# Altium PCB MAGI'sBoostPowerV3.PcbDoc
Units mil, origin at the board's own origin, x right, y up, seen from the top; angles counter-clockwise.
Board outline 6000 x 4000 mil, 2 copper layers (Top Layer, Bottom Layer); 21 components, 11 nets, 80 pads, 75 vias.
Unrouted connection lines stored in the file: 1.
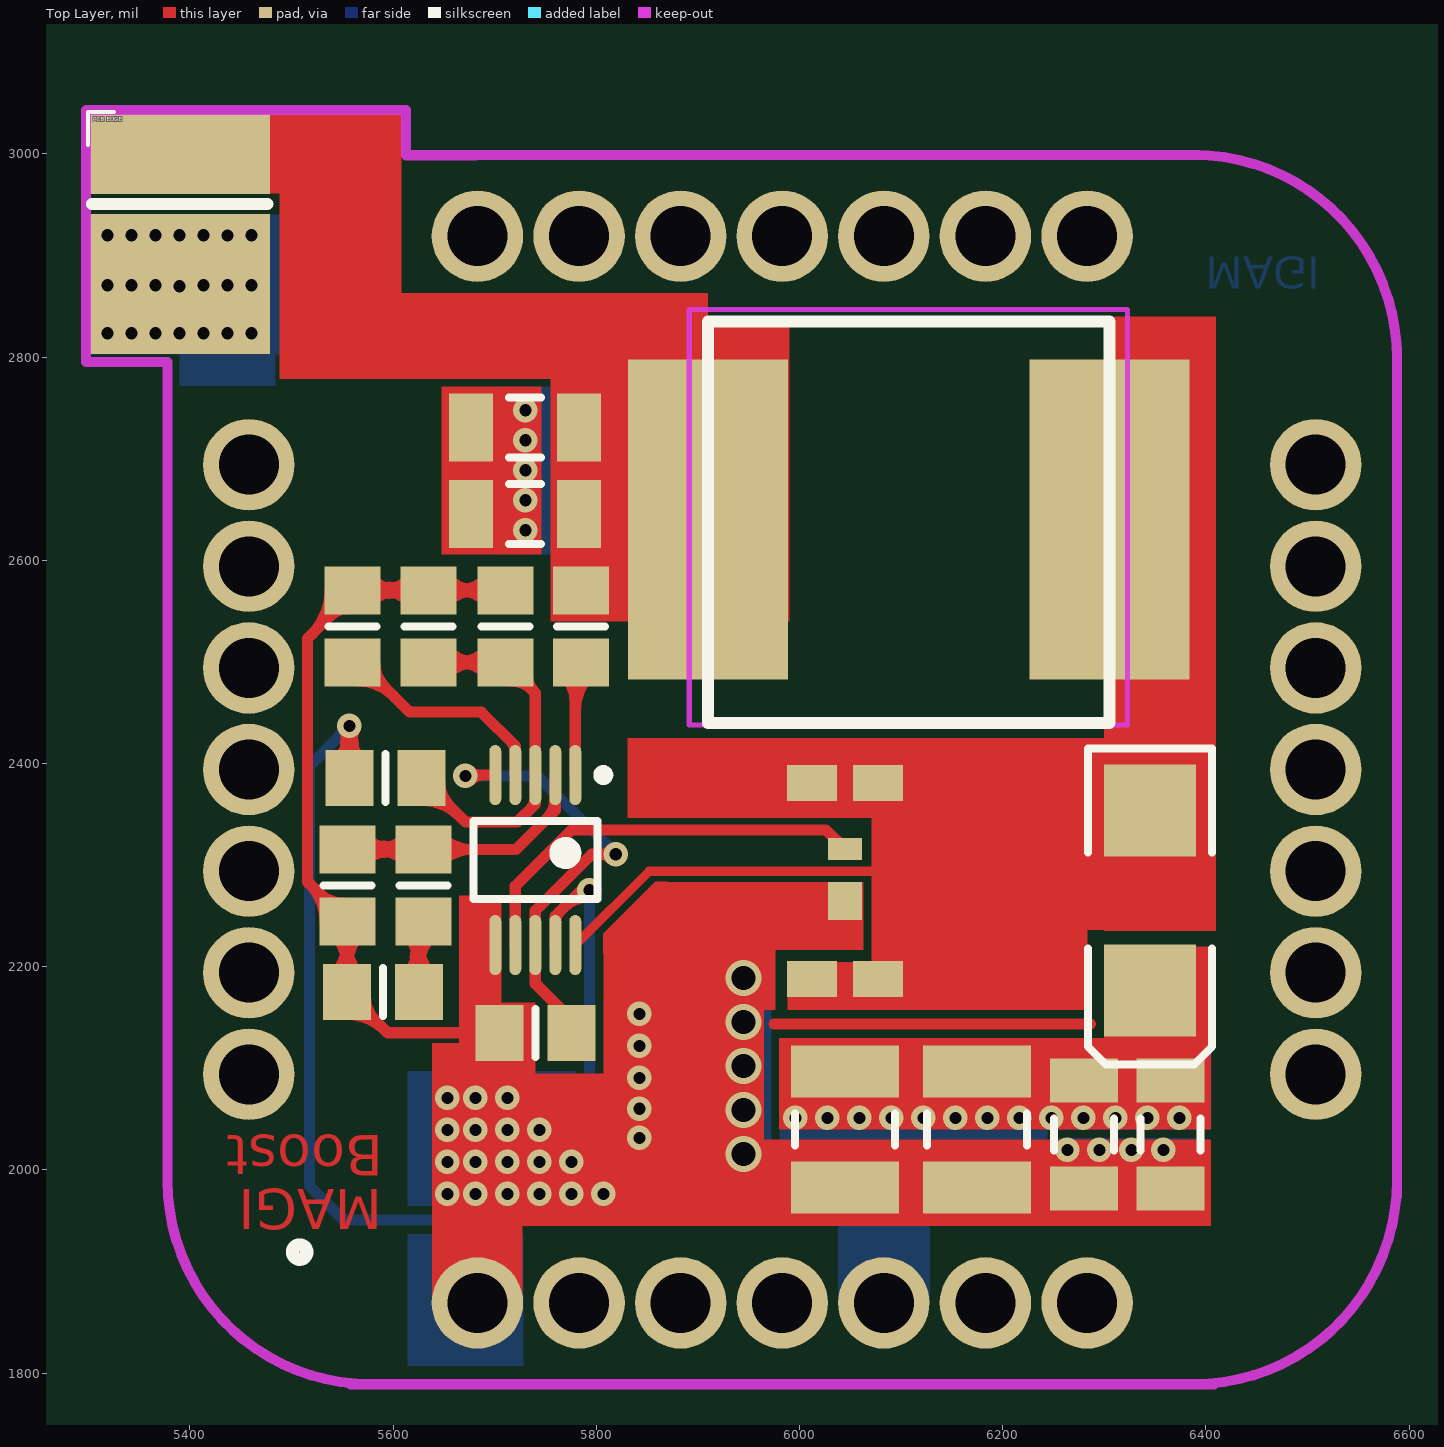
[diagram p0: Top Layer view]
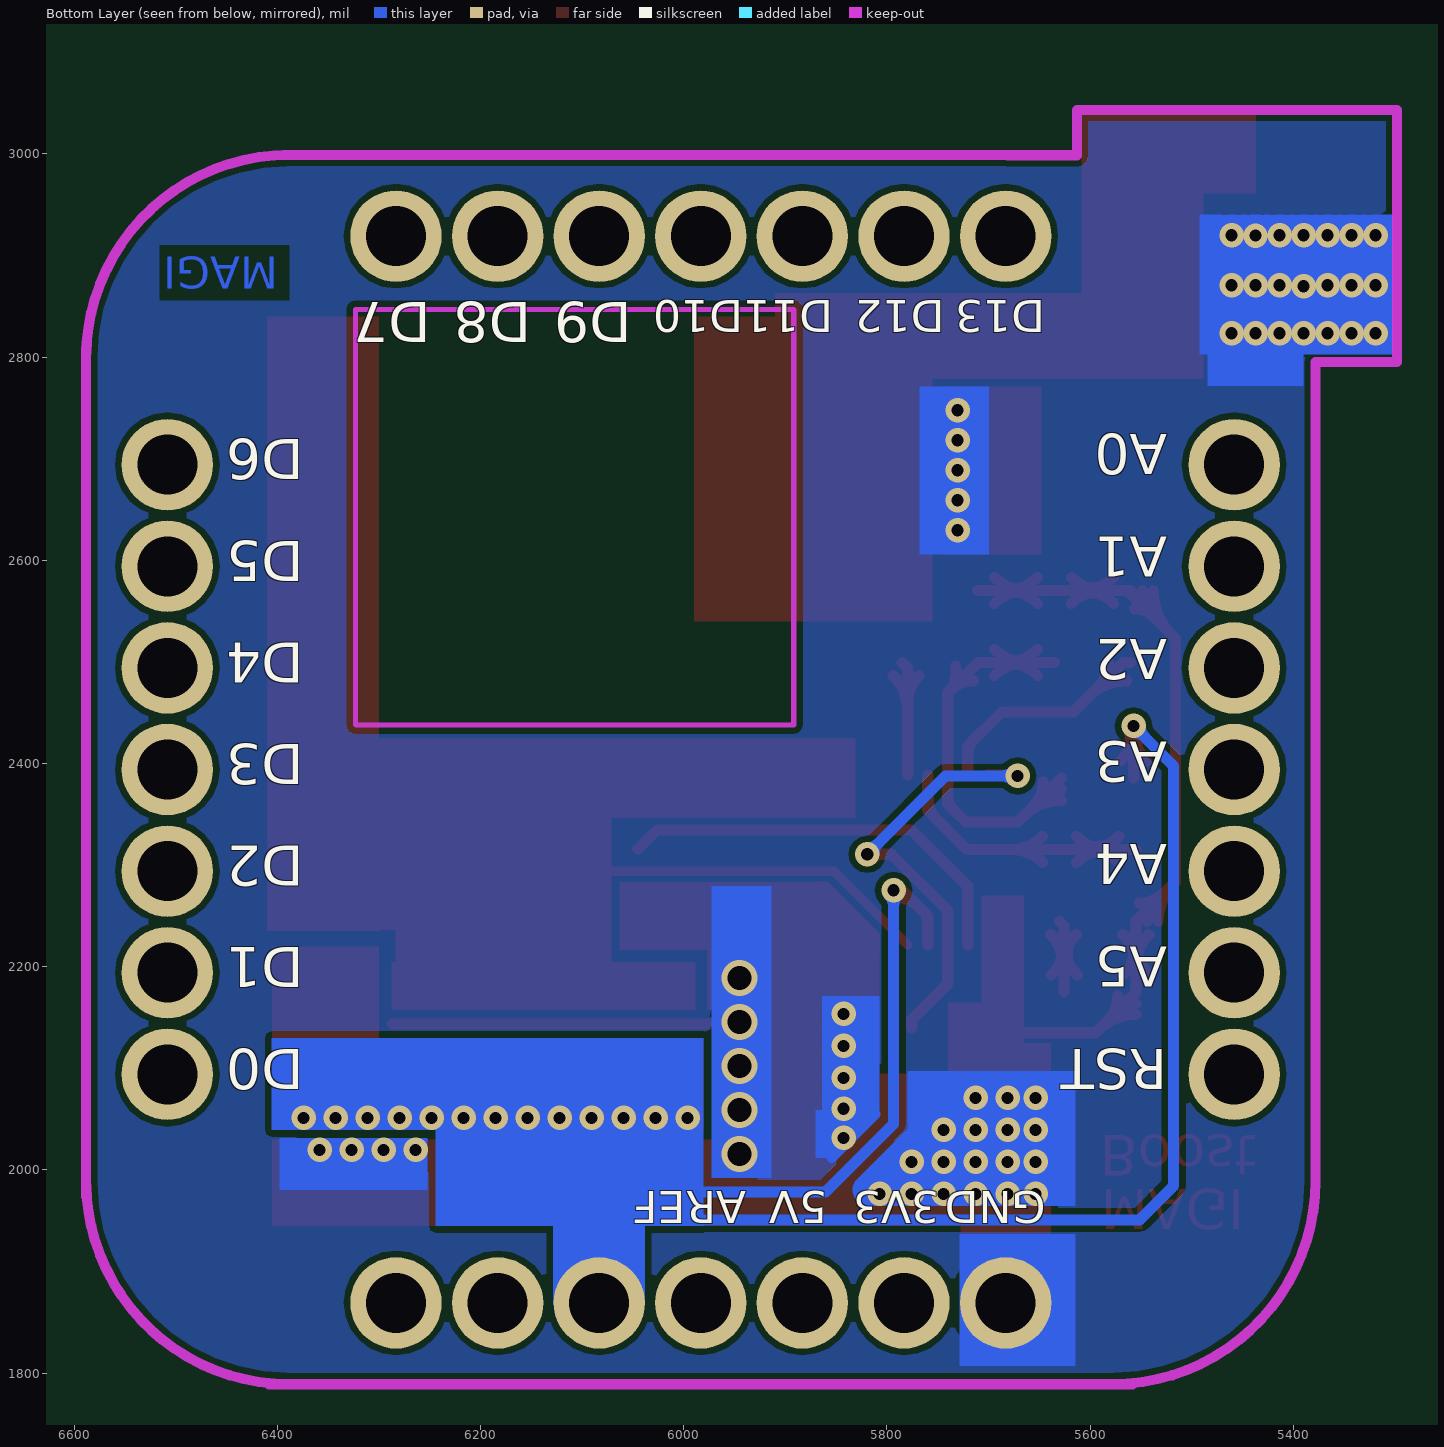
[diagram p1: Bottom Layer view, seen from below]

## Layer stack, top to bottom
Top Solder: solder mask 0.4, Solder Resist, Dk 3.5
Top Layer: signal copper 1.4
Dielectric 1: dielectric 12.6, FR-4, Dk 4.8
Bottom Layer: signal copper 1.4
Bottom Solder: solder mask 0.4, Solder Resist, Dk 3.5

## Board outline
1000,1000 7000,1000 7000,5000 1000,5000

## Design rules (kind name [scope] priority, off if disabled: settings)
Clearance [All] p1: gap=6
PolygonConnect [All] p1: connectstyle=Relief reliefconductorwidth=10 reliefentries=4 polygonreliefangle="90 Angle" airgapwidth=10
RoutingVias [All] p1: holewidth=280 width=500 viastyle="Through Hole" minholewidth=12 minwidth=24 maxholewidth=28 maxwidth=50
SolderMaskExpansion [All] p1: expansion=4
Width [All] p1: maxlimit=100 minlimit=6 preferedwidth=10
29 further rules are at their usual default settings.

## Components (designator, comment, footprint, x,y, rotation, side; value= is the part's Value field where it differs from the comment)
C1 "CAP_1" C1206 5730,2645.71 r180 top
C2 "CAP_1" C1206 5730,2730.71 r0 top
C3 "CAP_1" C1210_N 6175,2040 r90 top
C4 "CAP_1" C1210_N 6045,2040 r90 top
C5 "CAP_1" C1206 6365,2035 r90 top
C6 "CAP_1" C1206 6280,2035 r90 top
C7 "1uf" 6-0805_N 5555,2280 r90 top
C8 "CAP_1" 6-0805_n 5740,2135 r0 top
C9 "1uf" 6-0805_N 5590,2175 r0 top
D1 "DIODE_1" SMB 6345,2265 r270 top
D2 "LED_0805" 6-0805_n 5710.63,2535 r270 top
J1 "MAGIsBoard" MAGIsBoard 5983.07,2394.09 r180 top
J2 "CON2" T-Mini 5390.55,2935.83 r0 top
L1 "INDUCTOR" 10*10 6105,2640 r180 top
R1 "0805" 6-0805_N 5785,2535 r270 top
R2 "0805" 6-0805_N 5630,2280 r90 top
R3 "0805" 6-0805_N 5635,2535 r90 top
R4 "0805" 6-0805_N 5560,2535 r90 top
R5 "0805" 6-0805_N 5592.52,2385.83 r180 top
U1 "LTC1871" LTC1871 5740,2305 r270 top
U10 "NMOS" IRF8327 6015.75,2279.53 r270 top

## Footprints (in the part's own frame and the unit in brackets; to place one, negate y for a bottom-side part, rotate by r counter-clockwise, add the part's x,y. Pads: shape width x height; smd on the part's side, far side on the other; paste and mask are expansions set on the pad)
6-0805_N [mm] "Chip Resistor, Body 2.0x1.2mm, IPC Medium Density"
  rect 1.2x1.4 smd: 1(-0.9,0) 2(0.9,0)
  silkscreen extent 0,-0.6 0,0.6, body extent -1.07,-0.7 1.07,0.7, height 0.7
6-0805_n [mm] "Chip Resistor, Body 2.0x1.2mm, IPC Medium Density"
  rect 1.2x1.4 smd: 1(-0.9,0) 2(0.9,0)
  silkscreen extent 0,-0.6 0,0.6, body extent -1.07,-0.7 1.07,0.7, height 0.7
10*10 [mm]
  rect 4x8 smd: 1(-5.08,0) 2(4.953,0)
  silkscreen extent -5.08,-4.95 4.95,5.08
C1206 [mm] "Chip Capacitor, Body 3.2x1.6mm, IPC High Density"
  rect 1.1x1.7 smd: 1(-1.35,0) 2(1.35,0)
  silkscreen extent -0.4,-0.75 0.4,0.75, body extent -1.7,-0.9 1.7,0.9, height 1.3
C1210_N [mm] "Chip Capacitor, Body 3.2x2.5mm, IPC Medium Density"
  rect 1.3x2.7 smd: 1(-1.45,0) 2(1.45,0)
  silkscreen extent -0.4,-1.25 0.4,1.25, body extent -1.7,-1.35 1.7,1.35, height 1.5
IRF8327 [mm]
  rect 0.55x0.85 smd: 1(-0.92,0.745)
  rect 0.95x0.85 smd: 3(0.38,0.745)
  rect 0.9x1.25 smd: 4(-2.57,1.57) 4(-2.57,-0.08) 4(2.33,1.57) 4(2.33,-0.08)
LTC1871 [mm]
  oval 1.5x0.3 smd: 1(-2.125,1) 2(-2.125,0.5) 3(-2.125,0) 4(-2.125,-0.5) 5(-2.125,-1) 6(2.125,-1) 7(2.125,-0.5) 8(2.125,0) 9(2.125,0.5) 10(2.125,1)
  silkscreen extent -2.25,-1.55 0.97,1.83, body extent -1.55,-1.55 1.55,1.55, height 1.1
MAGIsBoard [mil]
  round 90 hole 59.06: 1(300,525) 2(200,525) 3(100,525) 4(0,525) 5(-100,525) 6(-200,525) 7(-300,525) 8(-525,300) 9(-525,200) 10(-525,100) 11(-525,0) 12(-525,-100) 13(-525,-200) 14(-525,-300) 15(-300,-525) 16(-200,-525) 17(-100,-525) 18(0,-525) 19(100,-525) 20(200,-525) 21(300,-525) 22(525,-300) 23(525,-200) 24(525,-100) 25(525,0) 26(525,100) 27(525,200) 28(525,300)
  Keep-Out Layer lines w10: 605,405 ccw(c405,405) 405,605 ; 425,605 -425,605 ; 370.2,-605 -410,-605 ; -405,605 ccw(c-405,405) -605,405 ; -405,-605 cw(c-405,-405) -605,-405 ; -605,420 -605,290 -605,-415
  silkscreen extent 468,468 482,482
SMB [mm] "DO-214-AA/SMB; 2 C-Bend Leads; Body 5.3 x 3.6 mm, inc. leads (LxW)"
  rect 2.3x2.3 smd: 1(-2.25,0) 2(2.25,0)
  silkscreen extent -3.8,-1.55 4.1,1.55
T-Mini [mm]
  rect 4.5x2 smd: 1(0,1.625)
  rect 4.5x3.5 smd: 2(0,-1.625)
  silkscreen extent -2.3,0.38 2.18,2.68

## Part data
C1 C2 C3 C4 C5 C6 C8: "Capacitor"
C7 C9: library part CAP_1, "Capacitor"
D1: "Diode"
D2: "LED"
J2: "Connector"
R1 R2 R3 R4 R5: library part RES1_1
U10: "TO252"

## Via types
v1: diameter 24, hole 12, Top Layer to Bottom Layer, 70 vias
v2: diameter 35.62, hole 23.62, Top Layer to Bottom Layer, 5 vias

## Nets (pads, with @x,y where several pads share a name; then routed paths per layer and width w, separated by ;. In a path a pad name is that pad's centre, name@x,y a point inside that pad or via, vN(x,y) a via of type N, cw(c..) or ccw(c..) an arc to the next point about the centre after c; other vN are vias at no path point)
GND: C1.2 C2.1 C3.1 C4.1 C5.1 C6.1 C7.1 C8.1 C9.1 D2.1 J1.1 J2.2 R3.2 R4.2 U1.6 U10.3 | length 2194.4
  Top Layer w11: 5517.34,2282.22 cw(c5479.69,2244.57) C7.1@5532.94,2244.57 ; 5519.92,2526.94 ccw(c5476.43,2570.43) R4.2@5537.94,2570.43 ; 5526.85,2272.72 ccw(c5551.06,2296.93) C7.1@5551.06,2262.69 ; C7.1@5536.12,2263.45 cw(c5517.24,2244.57) C7.1@5543.94,2244.57 ; 5537.69,2544.7 cw(c5556.06,2526.33) R4.2@5556.06,2552.31 ; 5538.7,2545.71 ccw(c5513.98,2570.43) R4.2@5548.94,2570.43 ; C9.1@5541.75,2191.75 ccw(c5510.82,2222.69) 5554.57,2222.69 ccw(c5598.32,2222.69) C9.1@5567.38,2191.75 ; C7.1@5542.19,2231.75 cw(c5512.29,2201.86) C9.1@5554.57,2201.86 ; C7.1@5546.35,2227.07 cw(c5543.99,2218.3) 5552.76,2215.95 ; C7.1@5554.13,2221.06 cw(c5566.55,2217.74) C7.1@5560.12,2228.87 ; C9.1@5554.57,2152.94 cw(c5554.57,2099.69) 5592.22,2137.34 ; C9.1@5554.57,2163.94 cw(c5554.57,2137.24) C9.1@5573.45,2156.12 ; C9.1@5554.57,2199.77 cw(c5599.8,2199.77) C7.1@5567.81,2231.75 ; C9.1@5572.69,2171.06 ccw(c5606.93,2171.06) 5582.72,2146.85 ; R4.2@5576.75,2557.62 cw(c5607.69,2526.68) 5607.69,2570.43 cw(c5607.69,2614.18) R4.2@5576.75,2583.25 ; 5595.94,2567.28 cw(c5600.84,2548.99) R3.2@5616.28,2559.95 ; 5595.94,2573.58 ccw(c5600.84,2591.87) R3.2@5616.28,2580.92 ; 5601.35,2568.73 ccw(c5595.37,2591.04) R3.2@5615.37,2579.49 ; 5601.35,2572.13 cw(c5595.37,2549.82) R3.2@5615.37,2561.37 ; R3.2@5618.25,2557.62 ccw(c5587.31,2526.68) 5587.31,2570.43 ccw(c5587.31,2614.18) R3.2@5618.25,2583.25 ; R3.2@5651.75,2557.62 cw(c5682.69,2526.68) 5682.69,2570.43 cw(c5682.69,2614.18) R3.2@5651.75,2583.25 ; C8.1@5691.75,2122.19 ccw(c5660.82,2091.25) 5660.82,2135 ccw(c5660.82,2178.75) C8.1@5691.75,2147.81 ; D2.1@5693.88,2557.62 ccw(c5662.94,2526.68) 5662.94,2570.43 ccw(c5662.94,2614.18) D2.1@5693.88,2583.25 ; C8.1 5594.57,2135 C9.1 5554.57,2244.13 C7.1 5515.94,2283.63 5515.94,2522.95 5560,2567.01 R4.2 R3.2 D2.1 ; 5975,2143.5 6286.22,2143.5
  Bottom Layer w10: 5811.02,2055.12 5854.33,2011.81 cw(c5867.78,2025.26) v1@5849.32,2029.82 ; 5815.9,2059.06 ccw(c5837.17,2059.06) 5822.13,2044.01 ; 5815.9,2059.16 ccw(c5831.3,2058.63) 5823.6,2045.28 ; 5817.13,2049.01 ccw(c5842.52,2074.41) v1@5842.52,2038.5 ; 5825.89,2058.81 ccw(c5850.15,2057.98) v1@5838.02,2036.95 ; 5825.9,2059.06 ccw(c5871.31,2059.06) v1@5839.2,2026.94
  Bottom Layer w30: 5770.59,2028.62 5818.9,1980.32
  other v1: 5653.54,1976.38 5681.1,1976.38 5712.6,1976.38 5744.09,1976.38 5775.59,1976.38 5807.09,1976.38 5653.54,2007.87 5681.1,2007.87 5712.6,2007.87 5744.09,2007.87 5775.59,2007.87 6263.78,2019.68 6295.28,2019.68 6326.77,2019.68 6358.27,2019.68 5842.52,2031.5 5653.54,2039.37 5681.1,2039.37 5712.6,2039.37 5744.09,2039.37 5842.52,2060.12 5653.54,2070.87 5681.1,2070.87 5712.6,2070.87 5842.52,2090.55 5842.52,2122.05 5842.52,2153.54 5730.31,2629.53 5730.31,2659.06 5730.31,2688.58 5730.31,2718.11 5730.31,2747.64 5318.9,2823.43 5342.52,2823.43 5366.14,2823.43 5389.76,2823.43 5413.39,2823.43 5437.01,2823.43 5460.63,2823.43 5389.76,2869.68 5318.9,2870.67 5342.52,2870.67 5366.14,2870.67 5413.39,2870.67 5437.01,2870.67 5460.63,2870.67 5318.9,2919.88 5342.52,2919.88 5366.14,2919.88 5389.76,2919.88 5413.39,2919.88 5437.09,2919.65 5460.63,2919.88
  other v2: 5944.88,2015.75 5944.88,2059.06 5944.88,2102.36 5944.88,2145.67 5944.88,2188.98
NetC7_2: C7.2 R2.2 U1.2 | length 565.1
  Top Layer w11: C7.2 R2.2 5720.94,2315.43 5759.69,2354.17 U1.2 ; C7.2@5571.75,2302.62 cw(c5602.69,2271.68) 5602.69,2315.43 cw(c5602.69,2359.18) C7.2@5571.75,2328.25 ; 5590.94,2312.28 cw(c5595.84,2293.99) R2.2@5611.28,2304.95 ; 5590.94,2318.58 ccw(c5595.84,2336.87) R2.2@5611.28,2325.92 ; 5596.35,2313.73 ccw(c5590.37,2336.04) R2.2@5610.37,2324.49 ; 5596.35,2317.13 cw(c5590.37,2294.82) R2.2@5610.37,2306.37 ; R2.2@5613.25,2302.62 ccw(c5582.31,2271.68) 5582.31,2315.43 ccw(c5582.31,2359.18) R2.2@5613.25,2328.25 ; R2.2@5646.75,2302.62 cw(c5677.69,2271.68) 5677.69,2315.43 cw(c5677.69,2359.18) R2.2@5646.75,2328.25 ; 5751.31,2345.8 ccw(c5732.07,2365.04) U1.2@5759.28,2365.04
NetC8_2: C8.2 U1.5 U1.8 | length 540.8
  Top Layer w11: v1(5671.26,2387.8) 5672.13,2388.66 U1.5 ; v1@5675.86,2383.2 cw(c5689.04,2370.01) 5689.04,2388.66 ; v1@5675.86,2392.39 ccw(c5684.86,2401.4) 5684.86,2388.66 ; C8.2@5775.43,2139.61 5775.43,2147.8 5740,2183.23 U1.8 5740,2255.12 5795.51,2310.63 v1(5819.29,2310.63) ; v1@5814.7,2306.03 ccw(c5803.6,2294.94) 5803.6,2310.63 ccw(c5803.6,2326.32) v1@5814.7,2315.23
  Bottom Layer w11: v1(5671.26,2387.8) 5742.13,2387.8 v1(5819.29,2310.63) ; v1@5675.86,2383.2 cw(c5686.95,2372.1) 5686.95,2387.8 cw(c5686.95,2403.49) v1@5675.86,2392.39 ; v1@5812.79,2310.63 ccw(c5797.1,2310.63) 5808.2,2321.73 ccw(c5819.29,2332.82) v1@5819.29,2317.13
NetC9_2: C9.2 R2.1 | length 253.2
  Top Layer w11: C9.2@5612.62,2191.75 ccw(c5581.68,2222.69) 5625.43,2222.69 ccw(c5669.18,2222.69) C9.2@5638.25,2191.75 ; R2.1@5613.25,2231.75 cw(c5583.83,2202.34) C9.2@5625.43,2202.34 ; R2.1@5614.84,2230.34 cw(c5602.35,2214.49) 5621.84,2209.27 ; 5622.78,2212.79 cw(c5648.37,2205.93) R2.1@5635.12,2228.87 ; C9.2 5625.43,2240 R2.1 ; C9.2@5625.43,2199.3 cw(c5671.33,2199.3) R2.1@5638.88,2231.75
NetD1_1: D1.1 L1.1 U1.10 U10.4 | length 393
  Top Layer w9: U1.10 5852,2293.96 6140.42,2293.96 6141.73,2295.28
NetD2_2: D2.2 R3.1 R5.1 U1.3 | length 651.2
  Top Layer w11: R5.1@5627.95,2363.77 cw(c5627.95,2310.51) 5665.61,2348.17 ; R5.1@5627.95,2374.77 cw(c5627.95,2348.07) R5.1@5646.83,2366.95 ; R5.1 5671.44,2342.34 5722.23,2342.34 5740,2360.11 U1.3@5740,2384.1 ; R3.1 5710,2499.57 5740,2469.57 ; R5.1@5646.07,2381.89 ccw(c5680.32,2381.89) 5656.11,2357.67 ; R3.1@5651.75,2486.75 cw(c5682.69,2455.82) 5682.69,2499.57 cw(c5682.69,2543.32) R3.1@5651.75,2512.38 ; D2.2@5693.88,2486.75 ccw(c5662.94,2455.82) 5662.94,2499.57 ccw(c5662.94,2543.32) D2.2@5693.88,2512.38 ; D2.2@5714.57,2481.45 cw(c5714.57,2448.72) 5737.71,2471.86 ; D2.2@5732.28,2495.75 ccw(c5760.17,2489.74) 5740,2469.57 ; 5735.82,2355.93 ccw(c5726.71,2365.04) U1.3@5739.59,2365.04 ; U1.3 5740,2469.57
NetR1_2: R1.2 U1.1 | length 182
  Top Layer w11: R1.2@5768.25,2486.75 cw(c5741.4,2459.9) 5779.37,2459.9 ; U1.1 5779.37,2493.94 R1.2 ; 5779.37,2451.73 cw(c5828.9,2451.73) R1.2@5793.88,2486.75
NetR4_1: R4.1 U1.4 | length 301.8
  Top Layer w11: R4.1 5567.56,2499.57 5616.33,2450.79 5686.74,2450.79 5720.31,2417.21 U1.4 ; R4.1@5563.94,2481.44 cw(c5563.94,2428.96) 5601.05,2466.07 ; R4.1@5582.06,2499.57 ccw(c5617.07,2499.57) 5592.31,2474.81 ; 5716.14,2421.39 cw(c5707.03,2412.28) U1.4@5719.91,2412.28
NetU1_7: U1.7 U10.1 | length 413.5
  Top Layer w11: U1.7 5720.31,2279.37 5775.59,2334.65 6026.18,2334.65 U10.1
VIN: C1.1 C2.2 J2.1 L1.2 R1.1
VOUT: C3.2 C4.2 C5.2 C6.2 D1.2 J1.5 R5.2 U1.9 | length 1824.1
  Top Layer w11: R5.2@5544.27,2402.58 ccw(c5513.34,2433.51) 5557.09,2433.51 ccw(c5600.84,2433.51) R5.2@5569.9,2402.58 ; v1@5551.46,2433.76 cw(c5535.19,2424.37) 5553.33,2419.51 ; v1@5552.49,2432.41 cw(c5541.39,2421.32) 5557.09,2421.32 cw(c5572.78,2421.32) v1@5561.68,2432.41 ; v1@5553.84,2431.38 cw(c5547.53,2420.46) 5559.71,2423.72 ; 5554.46,2423.72 cw(c5566.64,2420.46) v1@5560.34,2431.38 ; R5.2 v1(5557.09,2437.01) ; 5560.84,2419.51 cw(c5578.98,2424.37) v1@5562.72,2433.76 ; U1.9 5759.69,2249.89 v1@5791.68,2281.89 ; U1.9@5760.09,2244.96 cw(c5772.97,2244.96) 5763.86,2254.07 ; 5768.01,2258.22 cw(c5793.31,2232.93) v1@5793.31,2268.7
  Bottom Layer w11: v1@5550.59,2437.01 cw(c5534.89,2437.01) 5545.99,2425.91 cw(c5557.09,2414.82) v1@5557.09,2430.51 ; v1(5557.09,2437.01) 5517.72,2397.64 5517.72,1984.25 5551.18,1950.79 6049.21,1950.79 ; v1@5788.71,2270.6 cw(c5777.61,2259.5) 5793.31,2259.5 cw(c5809,2259.5) v1@5797.9,2270.6 ; v1(5793.31,2275.2) 5793.31,2045.28 5860.24,1978.35 5990.16,1978.35
  other v1: 5996.06,2051.18 6027.56,2051.18 6059.06,2051.18 6090.55,2051.18 6122.05,2051.18 6153.54,2051.18 6185.04,2051.18 6216.54,2051.18 6248.03,2051.18 6279.53,2051.18 6311.02,2051.18 6342.52,2051.18 6374.02,2051.18
pads on no net: J1.2 J1.3 J1.4 J1.6 J1.7 J1.8 J1.9 J1.10 J1.11 J1.12 J1.13 J1.14 J1.15 J1.16 J1.17 J1.18 J1.19 J1.20 J1.21 J1.22 J1.23 J1.24 J1.25 J1.26 J1.27 J1.28

## Polygon pours and split planes (outlines as drawn)
GND on Bottom Layer "Bottom Layer-No Net" (solid, remove dead copper, pour order 2): 5297.91,3043.35 5612.87,3043.35 5612.87,2999.09 5613.78,3000 6590.55,3000 6598.43,3000 6598.43,1783.46 5370.08,1783.46 5366.14,1783.46 5366.14,2787.4 5366.14,2795.32 5297.91,2795.32

## Keep-outs
Keep-Out Layer:
  lines w5: 5891.57,2437.95 6323.07,2437.95 6323.07,2847.01 5891.57,2847.01 5891.57,2437.95
  lines w10: 5375.98,2795.32 5297.91,2795.32 5297.91,3043.35 5612.87,3043.35 5612.87,2998.74 5680.98,2998.74 ; 5377.95,2794.88 5377.95,1989.09 5378.07,1989.09

## Other copper
Top Layer:
  rectangle net GND: 5638.58,1867.72 5727.56,2124.8
  rectangle net VIN: 5490.16,2778.35 5910.24,2862.99
  rectangle net VIN: 5488.19,2778.35 5608.27,3039.37
  rectangle net VIN: 5436.61,2961.02 5608.27,3038.98
  rectangle net VIN: 5755,2540 5990,2840
  rectangle net NetD1_1: 6300,2235 6410,2840
  rectangle net VOUT: 6300,2040 6405,2220
  rectangle net VOUT: 5980,2040 6405,2130
  rectangle net GND: 5980,1945 6405,2030
  rectangle net GND: 5807.09,1945 5965,2220
  rectangle net GND: 5830,1945 6000,2030
  rectangle net GND: 5680,1945 5740,2165
  rectangle net GND: 5680,1945 5965,2095
  rectangle net GND: 5665,2125 5706.69,2270
  rectangle net GND: 5665,1945 5740,2163.39
  rectangle net GND: 5647.64,2605.91 5746.06,2771.26
  rectangle net GND: 5881.89,2216.54 6062.99,2283.46
  rectangle net GND: 5858.27,2157.48 5976.38,2283.46
  rectangle net NetD1_1: 5988.19,2157.48 6287.4,2204.72
  rectangle net NetD1_1: 5830.71,2346.46 6370.08,2425.2
  rectangle net NetD1_1: 6070.87,2236.22 6334.65,2381.89
  rectangle net NetD1_1: 6070.87,2185.04 6283.46,2259.84
  rectangle net NetD1_1: 6070.87,2293.96 6149.61,2370.08
  region net GND: 5858.27,2283.46 5830.71,2255.91 5807.09,2232.28 5807.09,2212.6 5870.08,2212.6 5870.08,2283.46
  text "Boost" at 5590.24,2034.12 h40 r180
  text "MAGI" at 5589.45,1980.97 h39.37 r180
Bottom Layer:
  rectangle net GND: 5614.17,1807.09 5728.35,1937.01
  rectangle net GND: 5850.39,2011.81 5870.08,2019.68
  rectangle net GND: 5389.76,2771.65 5484.25,2823.43
  rectangle net GND: 6251.97,1980.32 6397.64,2031.5
  rectangle net GND: 5913.39,1992.13 5972.44,2279.53
  rectangle net GND: 5842.52,2019.68 5870.08,2031.5
  rectangle net GND: 5830.71,2027.56 5870.08,2043.31
  rectangle net GND: 5818.9,2039.37 5870.08,2059.06
  rectangle net GND: 5807.09,2051.18 5863.96,2171.04
  rectangle net GND: 5759.84,1964.57 5822.83,1992.13
  rectangle net GND: 5759.84,1992.13 5791.34,2023.62
  rectangle net GND: 5614.17,1964.57 5779.53,2097.6
  rectangle net VOUT: 6038.19,1867.72 6128.35,1975.59
  rectangle net GND: 5699.61,2605.51 5767.72,2770.87
  rectangle net GND: 5302.36,2802.76 5492.13,2940.55
  rectangle net VOUT: 5980.31,1944.88 6244.09,2129.92
  rectangle net VOUT: 5980.31,2039.37 6405.51,2129.92

## Silkscreen, mask and mechanical layers (free items; w line width, h text height)
Top Solder:
  lines w50: 5889.76,2251.97 5889.76,1972.44 5956.69,1972.44

## Text inside footprints (layer, text, board x,y; h text height)
J1: Bottom Overlay "AREF" at 5938.5,1979.25 h31.5 r180; Bottom Overlay "5V" at 5858.5,1979.25 h31.5 r180; Bottom Overlay "3V3" at 5748.5,1979.25 h31.5 r180; Bottom Overlay "GND" at 5643.5,1979.25 h31.5 r180; Bottom Overlay "RST" at 5524.09,2119.02 h39.37 r180; Bottom Overlay "A5" at 5524.09,2219.85 h39.37 r180; Bottom Overlay "A4" at 5524.09,2320.68 h39.37 r180; Bottom Overlay "A3" at 5524.09,2421.52 h39.37 r180; Bottom Overlay "A2" at 5524.09,2522.35 h39.37 r180; Bottom Overlay "A1" at 5524.09,2623.18 h39.37 r180; Bottom Overlay "A0" at 5524.09,2724.02 h39.37 r180; Bottom Overlay "D13" at 5644.09,2856.14 h31.5 r180; Bottom Overlay "D12" at 5743.1,2856.14 h31.5 r180; Bottom Overlay "D11" at 5852.59,2856.14 h31.5 r180; Bottom Overlay "D10" at 5941.1,2856.14 h31.5 r180; Bottom Overlay "D9" at 6051.09,2854.02 h39.37 r180; Bottom Overlay "D8" at 6150.09,2854.02 h39.37 r180; Bottom Overlay "D7" at 6249.09,2854.02 h39.37 r180; Bottom Overlay "D6" at 6374.09,2719.02 h39.37 r180; Bottom Overlay "D5" at 6374.09,2619.02 h39.37 r180; Bottom Overlay "D4" at 6374.09,2519.02 h39.37 r180; Bottom Overlay "D3" at 6374.09,2419.02 h39.37 r180; Bottom Overlay "D2" at 6374.09,2319.02 h39.37 r180; Bottom Overlay "D1" at 6374.09,2219.02 h39.37 r180; Bottom Overlay "D0" at 6374.09,2119.02 h39.37 r180; Bottom Layer "MAGI" at 6399.21,2898.82 h31.5 r180
J2: Top Overlay "PCB EDGE" at 5304.72,3032.09 h3.94